# Altium PCB DEV BOARD PCB.PcbDoc (part 2 of 2)
Units mil, origin at the board's own origin, x right, y up, seen from the top; angles counter-clockwise.
Board outline 4844 x 4603 mil, 2 copper layers (Top Layer, Bottom Layer); 78 components, 97 nets, 348 pads, 240 vias.
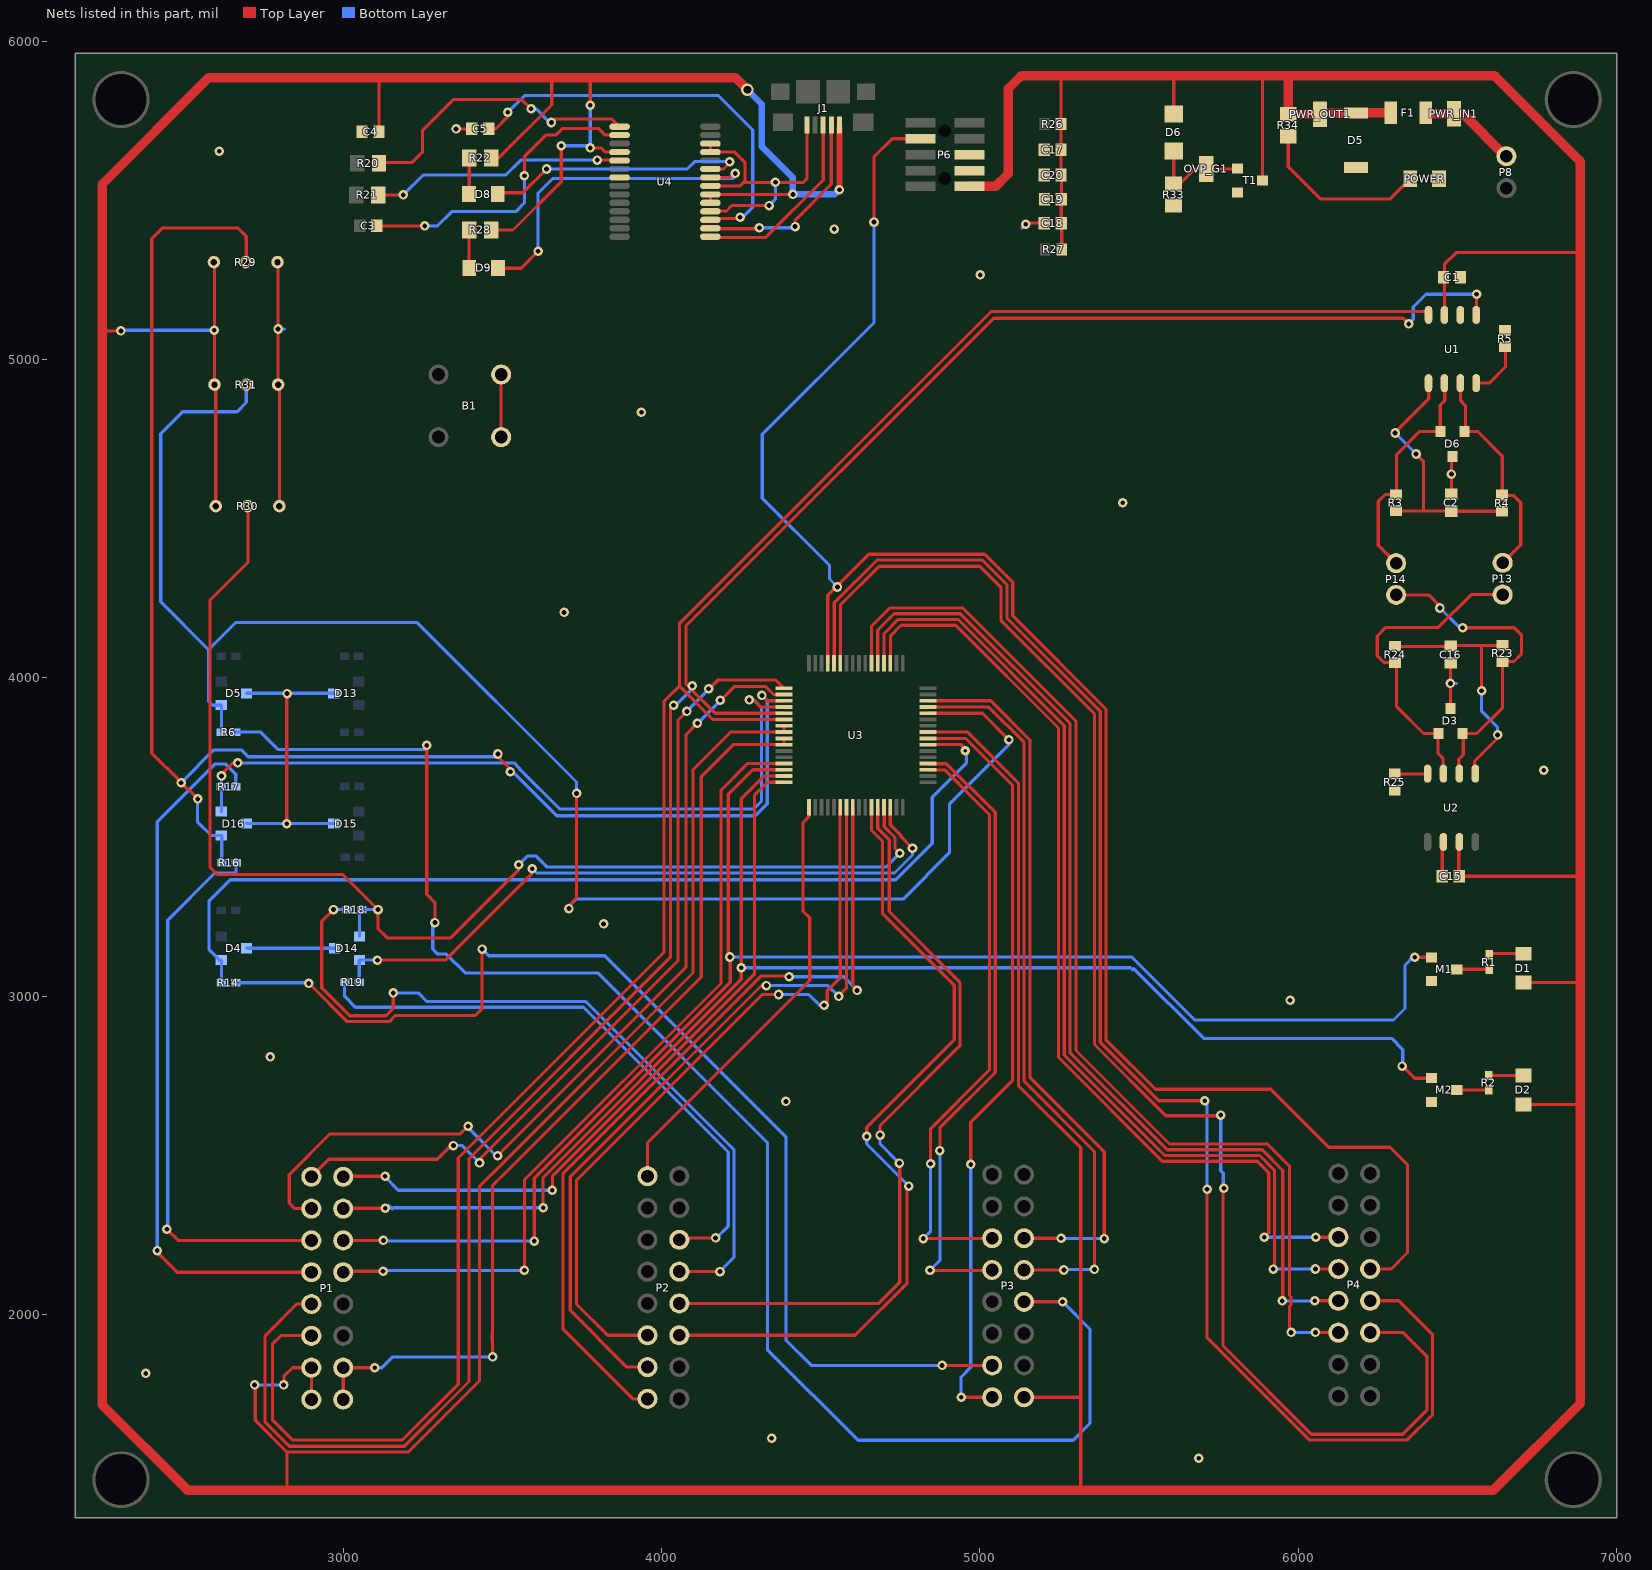
[diagram p2: the nets of this part, all layers, seen from the top]

## Via types
v1: diameter 30, hole 15, Top Layer to Bottom Layer, 236 vias
v2: diameter 30, hole 10, Top Layer to Bottom Layer, 3 vias
v3: diameter 40, hole 25, Top Layer to Bottom Layer, 1 vias

## Nets (pads, with @x,y where several pads share a name; then routed paths per layer and width w, separated by ;. In a path a pad name is that pad's centre, name@x,y a point inside that pad or via, vN(x,y) a via of type N, cw(c..) or ccw(c..) an arc to the next point about the centre after c; other vN are vias at no path point) (continued)
C5: P4.13 P6.8 U3.61 | length 5734.8
  Top Layer w10: 4521.36,4213.64 4521.42,4213.7 ; U3.61@4521.42,4046.38 4521.42,4213.7 ; v1(4667,5433) 4667,5638 4724,5695 P6.8@4813.23,5695 ; P4.13@6226.66,2142.29 6292.29,2142.29 6344,2194 6344,2470 6289,2525 6096,2525 5914,2707 5551.91,2707 5396,2862.91 5396,3902.54 5103,4195.54 5103,4301 5015,4389 4651,4389 4521.42,4259.42 4521.42,4213.7
  Bottom Layer w10: v1(4552,4286) 4527,4311 4527,4354 4316,4565 4316,4766 4667,5117 v1(4667,5433)
C6_UART1_RX: P4.4 U3.52 | length 3178.7
  Top Layer w10: U3.52@4698.58,4046.38 4698.58,4139.58 4743,4184 4931.09,4184 5265,3850.09 5265,2814.96 5580.96,2499 5879,2499 5925.71,2452.29 ; v1(5922,2142) 5926.29,2146.29 5926.29,2451.71 ; v1(6054.71,2142.29) P4.4@6126.66,2142.29
  Bottom Layer w10: v1(5922,2142) 6054.43,2142 v1(6054.71,2142.29)
C7_UART1_TX: P4.3 U3.51 | length 3043.5
  Top Layer w10: U3.51@4717.49,4054 4719.05,4054 4719.05,4133.05 4752,4166 4923.63,4166 5247,3842.63 5247,2807.51 5573.51,2481 5871.54,2481 5907.71,2444.83 5907.71,2255.71 v1(5894,2242) ; v1(6055.29,2242.29) P4.3@6126.66,2242.29
  Bottom Layer w10: v1(5894,2242) 6055,2242 v1(6055.29,2242.29)
C8_UART1_RX: P3.4 U3.36 | length 1996.5
  Top Layer w10: U3.36@4836.38,3731.42 4836.38,3730.64 4894.73,3730.64 5048,3577.37 5048,2760 4875.5,2587.5 4874.96,2587.5 4874,2586.54 v1(4874,2514.54) ; v1(4843,2138) 5037.48,2138 P3.4@5038.54,2139.06
  Bottom Layer w10: v1(4843,2138) 4874,2169 v1(4874,2514.54)
C9_UART1_TX: P3.3 U3.35 | length 1887.9
  Top Layer w10: v1(4822,2238) 5037.48,2238 P3.3@5038.54,2239.06 ; U3.35@4836.38,3711.73 4836.38,3710.95 4888.96,3710.95 5030,3569.91 5030,2768 4845,2583 v1(4845,2473)
  Bottom Layer w10: v1(4822,2238) 4845,2261 v1(4845,2473)
C14_ADC0_12_H: P2.14 R19.2 | length 1856.3
  Top Layer w10: P2.14@4055.06,2233.96 4061.1,2240 v1(4169,2240)
  Bottom Layer w10: R19.2@3003,3042 3003,2999 3037,2965 3249,2965 3754,2965 4209,2510 4209,2277.07 4171.93,2240 v1(4169,2240)
C14_ADC0_12_M: D14.2 R19.1 U3.30 | length 2141.9
  Top Layer w10: v1(3105.98,3113.02) 3319.02,3113.02 3421,3215 3590.89,3384.89 3590.89,3397.89 v1(3593,3400) ; U3.30@4718.27,3593.62 4718,3593.35 4718,3538.91 4751,3505.91 4751,3502 v1(4788,3465)
  Bottom Layer w10: R19.1@3048.93,3043.05 3048.93,3110.93 D14.2@3050,3112 ; D14.2@3050.06,3113.02 v1(3105.98,3113.02) ; v1(3593,3400) 3606,3387 3618,3387 4721,3387 4731.54,3387 4788,3443.46 v1(4788,3465)
C15_ADC0_13_H: P2.13 R18.2 | length 2429
  Top Layer w10: v1(2968,3272) 2931,3235 2931,3026 3019,2938 3133,2938 3156,2961 v1(3156,3010) ; P2.13@4055.06,2133.96 v1(4182.96,2133.96)
  Bottom Layer w10: v1(2968,3272) R18.2@3011,3272 ; v1(3156,3010) 3234.05,3010 3261.05,2983 3761.46,2983 4227,2517.46 4227,2179 4182.96,2134.96 v1(4182.96,2133.96)
C15_ADC0_13_M: D14.1 R18.1 R30.2 U3.29 | length 3923
  Top Layer w10: R30.2@2699,4540 2699,4363 2580,4244 2580,3405 2603,3382 2998,3382 v1(3107.98,3272.02) 3108,3212 3137,3183 3336,3183 3550,3397 v1(3550,3413) ; U3.29@4698,3588 4699.36,3586.64 4699.36,3532.09 4733,3498.46 4733,3464 v1(4748,3449)
  Bottom Layer w10: D14.1@3050.06,3187.82 3050.06,3264.06 R18.1@3056,3270 ; R18.1@3057.06,3272.02 v1(3107.98,3272.02) ; v1(3550,3413) 3577,3440 3605,3440 3637.92,3407.08 3637.92,3406 4705,3406 v1(4748,3449)
C16: P2.12 U3.28 | length 2449.1
  Top Layer w10: P2.12@4055.06,2033.96 4681.96,2033.96 4748,2100 v1@4748,2475 ; U3.28@4678.9,3593.62 4678.9,3527.1 4715,3491 4715,3266 4937,3044 4937,2843.6 4686,2592.6 v1(4686,2563)
  Bottom Layer w10: v1@4686,2562 4686,2536 v1(4747,2475)
C17: P2.11 U3.27 | length 2558
  Top Layer w10: P2.11@4055.06,1933.96 4607.42,1933.96 4771,2097.54 4771,2398 v1(4776,2403) ; v1(4644,2559) 4644,2588 4919,2863 4919,3034 4694,3259 4694,3486 4659.21,3520.79 U3.27@4659.21,3593.62
  Bottom Layer w10: v1(4644,2559) 4644,2535 v1(4776,2403)
CAN0_N: D6.2@6448.2,4775 P14.1 R3.1 U1.6 | length 742.4
  Top Layer w10: R3.1@6307.7,4576.37 6273.37,4576.37 6252,4555 6252,4417 P14.1@6308,4361 ; R3.1@6309,4575 6309,4701 6383,4775 D6.2@6447,4775 ; D6.2@6447,4768 D6.2@6447,4775 ; D6.2@6448.2,4775 D6.2@6447,4775 ; U1.6@6461,4927 6461,4872 6447,4858 D6.2@6447,4775
CAN0_P: D6.1@6523,4775 P13.1 R4.2 U1.7 | length 712
  Top Layer w10: U1.7@6511,4927 6511,4871 6526,4856 D6.1@6526,4775 ; D6.1@6523,4775 D6.1@6526,4775 ; R4.2@6641.07,4574.96 6642.03,4574 6677,4574 6700,4551 6700,4419 P13.1@6643,4362 P13.1@6643,4359 ; R4.2@6642,4579 6642,4697 6564,4775 D6.1@6526,4775
CAN1_N: D3.2 P14.2 R23.1 U2.6 | length 1013.3
  Top Layer w10: P14.2@6308,4261 6411,4261 6446,4226 v1(6446,4220) ; U2.6@6505.07,3698.06 6505.07,3745.07 6519,3759 D3.2@6519,3825.63 ; D3.2@6516.4,3825.63 D3.2@6519,3825.63 ; v1(6517,4158) 6680,4158 6702,4136 6702,4075 6678.82,4051.82 R23.1@6643,4051.82 ; D3.2@6519,3828 D3.2@6519,3825.63 ; R23.1@6644,4045 6643,4044 6643,3907 6561.63,3825.63 D3.2@6519,3825.63
  Bottom Layer w10: v1(6446,4220) 6508,4158 v1(6517,4158)
CAN1_P: D3.1 P13.2 R24.2 U2.7 | length 1013.6
  Top Layer w10: R24.2@6305.07,4048.19 6271,4048.19 6271,4047.81 6249,4069.81 6249,4132 6276,4159 6441,4159 6544,4262 P13.2@6643,4262 ; R24.2@6307,4046 6309,4044 6309,3911 6394.37,3825.63 D3.1@6440,3825.63 ; D3.1@6440,3826 D3.1@6440,3825.63 ; D3.1@6441.6,3825.63 D3.1@6440,3825.63 ; U2.7@6455.07,3698.06 6455.07,3747.93 6440,3763 D3.1@6440,3825.63
D0_SPI1_SCK: P1.2 U3.2 | length 2882.4
  Top Layer w10: P1.2@2898.53,2332.09 2846.64,2332.09 2829,2349.73 2829,2438 2828.5,2438.5 2957,2567 3367,2567 v1(3391,2591) ; v1(3483.7,2498) 4076,3090.3 4076,3821.43 v1(4112,3857.43) ; v1(4184,3930) 4185,3930 4228,3973 4326.13,3973 4351.18,3947.95 U3.2@4383.62,3947.95
  Bottom Layer w10: v1(3391,2591) 3391,2586 3483.7,2493.3 v1(3483.7,2498) ; v1(4112,3857.43) 4112.43,3857.43 4184,3929 v1(4184,3930)
D1_SPI1_SIN: P1.1 U3.1 | length 2642.9
  Top Layer w10: P1.1@2898.53,2432.09 2953.44,2487 3294,2487 3341,2534 v1(3345,2530) ; v1(3427,2475.8) 3427,2487 4051,3111 4051,3868 4078,3895 v1(4079,3895) ; v1(4147,3966) 4149,3966 4177,3994 4357.26,3994 U3.1@4383.62,3967.64
  Bottom Layer w10: v1(3345,2530) 3372.8,2530 v1(3427,2475.8) ; v1(4079,3895) 4079,3896 4147,3964 v1(4147,3966)
D2_SPI1_SOUT: P3.14 U3.46 | length 2288.5
  Top Layer w10: U3.46@4836.38,3928.27 5033.79,3928.27 5157,3805.05 5157,2745 5391,2511 v1(5391,2238) ; P3.14@5138.54,2239.06 v1(5255.06,2239.06)
  Bottom Layer w10: v1(5255.06,2239.06) 5256.13,2238 v1(5391,2238)
D3_SPI1_PCS0: P3.13 U3.45 | length 2319
  Top Layer w10: U3.45@4836.38,3908.58 5028.02,3908.58 5139,3797.6 5139,2732 5360,2511 v1(5360,2141) ; P3.13@5138.54,2139.06 v1(5263.94,2139.06)
  Bottom Layer w10: v1(5263.94,2139.06) 5265.87,2141 v1(5360,2141)
D4_ADC1_6_H: P3.12 R6.2 | length 4936.8
  Top Layer w10: v1(3261.05,3788) 3261.05,3319.95 3287,3294 v1(3287,3231) ; P3.12@5138.54,2039.06 v1(5259.94,2039.06)
  Bottom Layer w10: R6.2@2660.95,3829.86 2739.14,3829.86 2794,3775 3257,3775 3258,3774 3261.05,3777.05 v1(3261.05,3788) ; v1(3287,3231) 3280,3224 3280,3148 3296,3132 3322.82,3132 3381.82,3073 3798.73,3073 4332,2539.73 4332,1889 4617,1604 5292.91,1604 5346,1657.09 5346,1953 v1(5259.94,2039.06)
D4_ADC1_6_M: D5.1@2615.57,3914.45 R6.1 R31.2 U3.44 | length 5211.6
  Top Layer w10: R31.2@2690,4914 2688,4916 R31.2@2691,4919 ; v1(3708,3275) 3703,3280 3732,3309 v1(3732,3637) ; U3.44@4836.38,3888.9 5008.1,3888.9 v1(5091,3806)
  Bottom Layer w10: D5.1@2613,3913 2615.67,3910.33 R6.1@2615.67,3829.86 ; D5.1@2615.57,3914.45 2587.55,3914.45 2575,3927 2575,4089 ; R31.2@2694,4922 2694,4866 2665,4837 2494,4837 2425,4768 2425,4239 2575,4089 ; v1(3708,3275) 3708,3281.75 3730,3303.75 ; 3730,3305 4758.46,3305 4904,3450.54 4904,3602.63 5091,3789.63 v1(5091,3806) ; v1(3732,3637) 3732,3673 3231,4174 2660,4174 2575,4089
D5: P2.8 U3.24 | length 2640.3
  Top Layer w10: P2.8@3955.06,1733.96 3909.04,1733.96 3689,1954 3689,2441 4311,3063 4389,3063 4400,3052 v1(4400,3061) ; U3.24@4600.16,3593.62 4600,3593.46 4600,3036 4614,3022 v1(4614,3018)
  Bottom Layer w10: v1(4400,3061) 4572,3061 4614,3019 v1(4614,3018)
D6_UART2_RX: P2.7 U3.23 | length 2451.2
  Top Layer w10: P2.7@3955.06,1833.96 3890.04,1833.96 3712,2012 3712,2432 4315,3035 4317,3033 v1(4329,3033) ; v1(4556,2999) 4556,3000.99 4581,3025.99 4581,3130 4580.47,3130.53 ; 4580.47,3130 4580.47,3130.53 ; U3.23@4580.47,3593.62 4580.47,3130.53
  Bottom Layer w10: v1(4329,3033) 4522,3033 v1(4556,2999)
D7_UART2_TX: P2.6 U3.22 | length 2331.7
  Top Layer w10: P2.6@3955.06,1933.96 3829.96,1933.96 3732,2031.93 3732,2421.05 4315.95,3005 v1(4367,3005) ; v1(4510,2971) 4520,2981 4520,3017 4561,3058 4561,3128 ; 4560.79,3127 4560.5,3127.29 4560.5,3593.33 U3.22@4560.79,3593.62
  Bottom Layer w10: v1(4367,3005) 4462,3005 4496,2971 v1(4510,2971)
D15_LED_R2: M2.1 P1.15 U3.15 | length 4689.8
  Top Layer w10: P1.15@3005,2328 3010,2333 v1(3131,2333) ; v1(3627,2335) 3627,2429.91 4250,3052.91 v1(4250,3089) 4250,3620 4322.05,3692.05 U3.15@4383.62,3692.05 ; v1(6327,2780) 6329,2780 6367,2742 M2.1@6420,2742
  Bottom Layer w10: v1(3131,2333) 3140.96,2342.96 3152.91,2331 3156.91,2335 v1(3627,2335) ; v1(4250,3089) 5473,3089 5480,3082 5484,3086 5703,2867 6294,2867 6329,2832 v1@6329,2781
D16_LED_R1: M1.1 P1.14 U3.14 | length 4926.9
  Top Layer w10: P1.14@3000,2230 3002,2232 v1(3125,2232) ; v1(3599,2230) 3599,2427.37 4215,3043.37 4215,3122 v1(4214,3123) 4220,3123 4209,3134 4209,3634.54 4286.19,3711.73 U3.14@4383.62,3711.73 ; v1(6367,3122) M1.1@6418,3122
  Bottom Layer w10: v1(3125,2232) 3129,2228 3131,2230 v1(3599,2230) ; v1(4214,3123) 5477,3123 5675,2925 6300,2925 6336,2961 6336,3097 6361,3122 v1(6367,3122)
D_N: J1.2 U4.16 | length 614.7
  Top Layer w10: U4.16@4161,5416 4165,5412 4304,5412 v1(4307,5415) ; v1(4419,5419) 4419,5439 4532.83,5552.83 J1.2@4532.83,5724
  Bottom Layer w10: v1(4307,5415) 4415,5415 v1(4419,5419)
D_P: J1.3 U4.15 | length 599.7
  Top Layer w10: U4.15@4145,5385 4327,5385 4507.24,5565.24 J1.3@4507.24,5728
E0_I2C1_SDA: P4.12 U3.60 | length 4895.2
  Top Layer w10: U3.60@4540.32,4052 4541.88,4053.56 4541.88,4235.88 4677,4371 5007.54,4371 5085,4293.54 5085,4188.09 5378,3895.09 5378,2855.46 5562.46,2671 v1(5707,2671) ; v1(5714,2393) 5714,1925.54 6034.54,1605 6343,1605 6423,1685 6423,1936 6316.71,2042.29 P4.12@6226.66,2042.29
  Bottom Layer w10: v1(5707,2671) 5714,2664 v1(5714,2393)
E1_I2C1_SCL: P4.11 U3.59 | length 4689.1
  Top Layer w10: U3.59@4560.01,4071 4561.57,4072.56 4561.57,4229.57 4683,4351 5000,4351 5066,4285 5066,4181 5360,3887 5360,2848 5584,2624 5755,2624 v1(5757,2626) ; v1(5767,2396) 5769,2396 5764,2391 5764,1901 6042,1623 6329.46,1623 6405,1698.54 6405,1868 6330.71,1942.29 P4.11@6226.66,1942.29
  Bottom Layer w10: v1(5757,2626) 5757,2451 5765,2443 v1@5765,2396
E2_SPI0_SOUT: P4.6 U3.54 | length 3464.4
  Top Layer w10: U3.54@4659.21,4046.38 4659.21,4162.21 4717,4220 4946,4220 5302,3864 5302,2828.87 5595.87,2535 5903.42,2535 5973.14,2465.28 5973.18,2456.82 5973.18,2058.42 5978,2053.6 5978,2030.4 5973.18,2025.58 5973.18,1947.82 v1(5978,1943) ; v1(6054.71,1942.71) 6054.71,1942.29 P4.6@6126.66,1942.29
  Bottom Layer w10: v1(5978,1943) 6054.43,1943 v1(6054.71,1942.71)
E3_UART2_RTS: P1.13 U3.13 | length 2575.8
  Top Layer w10: P1.13@3005,2137 3007,2135 v1(3124,2135) ; v1@3557,2134 3561,2138 v1(3568,2138) 3568,2422 3568.09,2421.91 4185.96,3039.79 4185.96,3647.51 4269.87,3731.42 U3.13@4383.62,3731.42
  Bottom Layer w10: v1(3124,2135) 3127,2138 v1(3568,2138)
E4_CAN0_RX: P1.6 U1.4 U3.6 | length 6879.5
  Top Layer w10: P1.6@2898.53,1932.09 2897.63,1933 2803,1933 2776,1906 2776,1668 2839,1605 3185,1605 3360,1780 3360,2491 4007,3138 4007,3926.6 4056,3975.6 4056,4172.28 5035.72,5152 5081,5152 ; 4056,3974 4160.79,3869.21 U3.6@4383.62,3869.21 ; 5072,5152 6334,5152 6399.28,5152 U1.4@6410,5141.28
E5_CAN0_TX: P1.5 U1.1 U3.5 | length 7288
  Top Layer w10: P1.5@2898.53,2032.09 2853.09,2032.09 2753,1932 2753,1661 2829,1585 3190.46,1585 3394,1788.54 3394,2489 4027,3122 4027,3903 v1@4038,3914 ; v1(4037,3914) v1@4038,3914 ; v1@4039,3915 v1@4038,3914 ; v1@4093,3964 4076,3981 4076,4164 5043,5131 5115,5131 ; v1@4093.5,3963.5 4168.1,3888.9 U3.5@4383.62,3888.9 ; v1@4095,3966 4101,3972 4098,3975 v1(4096,3975) ; 5093,5131 6330,5131 v1(6348,5113) ; U1.1@6560,5141.28 6561,5142.28 v1(6561,5206)
  Bottom Layer w10: v1(4037,3914) 4044,3914 4101,3971 4097,3975 v1(4096,3975) ; v1(6348,5113) 6362,5127 6362,5166 6402,5206 v1(6561,5206)
E6_SPI0_PCS2: P4.5 U3.53 | length 3317.5
  Top Layer w10: U3.53@4678.9,4046.38 4678.9,4150.9 4730,4202 4938.54,4202 5283,3857.54 5283,2822.42 5588.42,2517 5886.91,2517 5951.91,2452 5952,2429 5952,2044 v1(5950,2042) ; v1(6052.29,2042.29) P4.5@6126.66,2042.29
  Bottom Layer w10: v1(5950,2042) 6052,2042 v1(6052.29,2042.29)
E7_ADC2_2_H: P3.7 R14.2 | length 3549.8
  Top Layer w10: v1(2890,3040) 2891,3040 3011,2920 3143,2920 3162,2939 3414,2939 3435.05,2960.05 v1(3435.05,3148) ; v1(4880.94,1839.06) P3.7@5038.54,1839.06
  Bottom Layer w10: R14.2@2660.31,3041.95 2888.05,3041.95 v1(2890,3040) ; v1(3435.05,3148) 3456.05,3127 3821.1,3127 4390,2558.1 4390,1919 4469.94,1839.06 v1(4880.94,1839.06)
E7_ADC2_2_M: D4.1 R14.1 U3.39 | length 3100.9
  Top Layer w10: U3.39@4836.38,3790.47 4941.53,3790.47 4954,3778 v2(4954,3771)
  Bottom Layer w10: D4.1@2614,3109 2577,3146 2577,3300 2643,3366 2694,3366 4736,3366 4850,3480 4850,3625 4957.5,3732.5 4957.5,3774.5 v2(4954,3771) ; D4.1@2615.57,3113.02 2615.57,3040.43 R14.1@2616,3040
E8: P2.1 U3.17 | length 1387.2
  Top Layer w10: P2.1@3955.06,2433.96 3955.06,2539.06 4465,3049 4465,3246 4444,3267 4444,3545.51 4462.36,3563.87 U3.17@4462.36,3593.62
E9_UART2_CTS: P1.16 U3.16 | length 2295.8
  Top Layer w10: P1.16@2995,2430 2999,2434 v1(3130,2434) ; v1(3656,2390) 3656,2433.46 4291,3068.46 4291,3631 4332.36,3672.36 U3.16@4383.62,3672.36
  Bottom Layer w10: v1(3130,2434) 3130,2432 3172,2390 v1(3656,2390)
E10_ADC2_12_H: P1.4 R17.2 | length 2237.7
  Top Layer w10: v1(2414,2200) 2414,2195.18 2477.09,2132.09 P1.4@2898.53,2132.09
  Bottom Layer w10: v1(2414,2200) 2414,3548 2596,3730 2628,3730 2660.84,3697.16 R17.2@2660.84,3658.82
E10_ADC2_12_M: D16.2 R17.1 U3.4 | length 2359.9
  Top Layer w10: v1(2616,3692) 2616,3697 2652,3733 v1@2666,3733 ; v1(4275,3931) 4288.17,3931 4310.58,3908.58 U3.4@4383.62,3908.58
  Bottom Layer w10: R17.1@2615,3658 2615.57,3657.43 D16.2@2615.57,3579.62 ; R17.1@2615.57,3658.82 2616,3659.25 v1(2616,3692) ; v1(2667,3733) 3535.6,3733 3552,3716.6 3552,3715 3679,3588 4289,3588 4313.27,3612.27 4313.27,3906.67 4288.94,3931 v1(4275,3931)
E11_ADC2_13_H: P1.3 R16.2 | length 1757.5
  Top Layer w10: v1(2444.5,2267.5) 2479.91,2232.09 P1.3@2898.53,2232.09 P1.3@2892.63,2238
  Bottom Layer w10: v1(2444.5,2267.5) 2447,2270 2447,3239 2594,3386 2662,3386 R16.2@2662,3418
E11_ADC2_13_M: D16.1 R16.1 R29.2 U3.3 | length 4893.5
  Top Layer w10: v1(2541,3620) 2490,3671 v1(2489,3671) 2489,3672 2397,3764 2397,5381 2430,5414 2668,5414 2694,5388 R29.2@2694,5312 ; v1@3485,3753 3524,3714 v1(3524,3705) ; v1(4314.54,3945) 4331.27,3928.27 U3.3@4383.62,3928.27
  Bottom Layer w10: v1(2489,3671) 2592,3774 2678.6,3774 2700.1,3752.5 2722,3752.5 3476.5,3752.5 v1(3485,3761) ; v1(2541,3620) 2541,3547 2583.19,3504.81 D16.1@2615.57,3504.81 ; R16.1@2617,3419.82 D16.1@2617,3505 ; v1@3522,3715 3670,3567 4293.46,3567 4331.27,3604.81 4331.27,3928.27 v1(4314.54,3945)
FTDI_GREEN: D8.2 U4.23 | length 839.8
  Top Layer w10: D8.2@3486,5525 3563,5525 v1(3637.92,5599.92) ; U4.23@4152.72,5599.92 4193.92,5599.92 4213,5619 v1(4213,5623)
  Bottom Layer w10: v1(3637.92,5599.92) 4080,5599.92 4080,5600 4103,5623 v1(4213,5623)
FTDI_RED: D9.2 U4.22 | length 1061.3
  Top Layer w10: D9.2@3490,5288 3558,5288 v1(3611,5341) ; U4.22@4152.72,5573.31 4212.31,5573.31 4226,5587 4227,5586 v1(4231,5586)
  Bottom Layer w10: v1(3611,5341) 3611,5524 3657,5570 4224,5570 4231,5577 v1(4231,5586)
GND: B1.2 B1.4 C1.1 C2.1 C4.1 C5.1 C15.1 C16.1 C17.1 C18.1 C19.1 C20.1 D3.3 D4.3 D5.1@6182,5604.37 D5.3 D6.3 D13.3 D14.3 D15.3 D16.3 J1.5 M1.2 M2.2 P1.9 P1.10 P3.8 P6.3 P6.5 POWER.2 R5.1 R25.1 R29.3 R30.3 R31.3 R33.1 T1.2 U1.2 U2.2 U3.9 U3.10 U3.40 U4.7 U4.18 U4.21 U4.25 U4.26 | length 9130.7
  Top Layer w10: R29.3@2793,5307 2794,5306 v1(2794,5097) R31.3@2794,4922 ; R31.3@2795,4921 2798,4918 R30.3@2798,4540 ; v1(2821.21,3542) 2821.21,3950.21 v1(2822,3951) ; P1.9@2998.53,1732.09 P1.10@2998.53,1832.09 v1(3097.91,1832.09) ; v1(3353.3,5725.7) C5.1@3402.57,5725.7 ; v1(3468,1866) 3468,1915.4 3467,1916.4 3467,1939.6 3468,1940.6 3468,2404.91 3496.06,2432.97 3497.03,2432.97 3505.53,2441.47 4124,3059.95 4124,3690 4224.47,3790.47 U3.10@4383.62,3790.47 U3.9@4383.62,3810.16 ; B1.4@3494,4954 3495,4953 B1.2@3495,4757.15 ; U4.18@4152.72,5466.85 4153.87,5468 4203.46,5468 4220.46,5485 v1(4337.3,5485) ; U4.21@4152.72,5546.69 4245.69,5546.69 4256,5557 ; U4.26@4152.72,5679.76 U4.25@4152.72,5653.15 4228.97,5653.15 4262,5620.12 4262,5563 4256,5557 ; v1(4357,5558) v1@4358,5557 ; J1.5@4456.06,5722 4456.06,5569.06 4444,5557 v1@4358,5557 ; U3.40@4836.38,3810.16 4837.16,3809.38 4956.17,3809.38 5102,3663.54 5102,2734 4971,2603 v1(4971,2471) ; v1(4940.94,1739.06) P3.8@5038.54,1739.06 ; v1(5144,5426) 5148.08,5430.08 C18.1@5202.39,5430.08 ; C17.1@5201.85,5658.85 C17.1@5202,5659 ; C20.1@5202,5581 C20.1@5202.86,5580.14 ; C19.1@5202.39,5504.39 C19.1@5203,5505 ; C15.1@6453,3376 6453,3481.43 U2.2@6455.07,3483.5 ; C16.1@6477,4048 6479,4046 v1(6479,3983) D3.3@6479,3904.37 ; D6.3@6481,4696 6482.07,4694.93 v1(6482.07,4641) C2.1@6482.07,4577.35 ; 4256,5557 v1@4358,5557
  Bottom Layer w10: D5.3@2694.31,3951.86 D13.3@2968.79,3951.86 2969.14,3951.86 D13.3@2971,3950 ; D16.3@2695,3544 2696.79,3542.21 v1@2821,3542.21 ; D4.3@2696,3152 2697.58,3150.42 D14.3@2971.32,3150.42 ; v1(2794,5097) 2813,5097 ; v1(2821.21,3542) v1@2821,3542.21 ; D15.3@2968.79,3542.21 v1@2821,3542.21 ; v1(3097.91,1832.09) 3120.09,1832.09 3154,1866 v1(3468,1866) ; v1@3342.7,5725.7 v1(3353.3,5725.7) ; v1(4337.3,5485) 4357,5504.7 v1(4357,5558) ; v1(4940.94,1739.06) 4940.94,1802.06 4940.5,1802.5 4971,1833 v1(4971,2471) ; 5133,5415 v1(5144,5426) ; v1(5449,4551) v1@5458,4551 ; v1(6479,3983) 6497,3983
  other v1: 5688,1547 4345,1610 2378,1814 4390,2669 2769,2809 5975,2987 3817,3227 6772,3710 3693,4206 3936,4835 5001,5267 4542,5411 2609,5656
NetC2_2: C2.2 R3.2 R4.1 U1.5 | length 819.7
  Top Layer w10: v1(6305,4770) 6304,4771 6411,4878 U1.5@6411,4927 ; R3.2@6307.7,4525.19 6480.81,4525.19 C2.2@6482,4524 ; v1(6371,4704) 6394,4681 6394,4526 ; C2.2@6482.07,4524.2 6639.8,4524.2 R4.1@6643,4521
  Bottom Layer w10: v1(6305,4770) v1(6371,4704)
NetC3_1: C3.1 U4.2 | length 985.3
  Top Layer w10: C3.1@3103.61,5421.02 v1@3255.98,5421.02 ; v1(3568,5579) 3568,5638.69 3635.68,5706.38 3666.38,5706.38 3687,5727 3802,5727 3822.62,5706.38 U4.2@3867.28,5706.38
  Bottom Layer w10: v1(3255,5421) 3295,5421 3340,5466 3541,5466 3568,5493 v1(3568,5579)
NetC16_2: C16.2 R23.2 R24.1 U2.5 | length 798.1
  Top Layer w10: R24.1@6305.07,4099.37 6479.37,4099.37 C16.2@6480,4100 ; C16.2@6480,4102 6577,4102 ; C16.2@6480.37,4099.37 C16.2@6481,4100 ; U2.5@6555.07,3698.06 6555.07,3739.07 6632,3816 v1(6627,3821) ; v1(6577,3960) 6577,4102 ; R23.2@6643,4103 6642,4102 6577,4102
  Bottom Layer w10: v1(6577,3960) 6577,3895 6627,3845 v1(6627,3821)
NetD1_2: D1.2 R1.2 | length 106.7
  Top Layer w10: R1.2@6602,3133 6602.46,3133.46 D1.2@6708.47,3133.46
NetD2_2: D2.2 R2.2 | length 109.8
  Top Layer w10: R2.2@6599,2751 6599.77,2750.23 D2.2@6708.47,2750.23
NetD6_1: D6.1@5609,5656.86 OVP_G1.1 R33.2 T1.1 | length 320.9
  Top Layer w10: R33.2@5609,5554 5629,5554 5675,5600 T1.1@5810,5600 ; R33.2@5609,5556 D6.1@5609,5656.86
NetD8_1: D8.1 R22.1 | length 108.7
  Top Layer w10: R22.1@3394.7,5634.71 3394.7,5529.3 D8.1@3397,5527
NetD9_1: D9.1 R28.1 | length 117.6
  Top Layer w10: D9.1@3394.45,5289 3394.45,5404.45 R28.1@3396,5406
NetM1_3: M1.3 R1.1 | length 103.6
  Top Layer w10: M1.3@6498.37,3084.24 6598.76,3084.24 R1.1@6601,3082
NetM2_3: M2.3 R2.1 | length 99.9
  Top Layer w10: M2.3@6500,2706 6501.05,2704.95 R2.1@6599.44,2704.95
NetPOWER_1: POWER.1 R34.1 | length 547.8
  Top Layer w10: R34.1@5969,5703.1 5969,5607 6070,5506 6289.72,5506 POWER.1@6352.72,5569
NetR5_2: R5.2 U1.8 | length 175.1
  Top Layer w10: U1.8@6561,4927 6601,4927 6652,4978 R5.2@6652,5041
NetR20_1: R20.1 U4.1 | length 928.5
  Top Layer w10: R20.1@3112,5620 3214,5620 3248,5654 3248,5722 3344,5818 3560,5818 v1(3589,5789) ; v1(3653,5746) 3664,5757 3843.28,5757 U4.1@3867.28,5732.99
  Bottom Layer w10: v1(3589,5789) 3605,5789 3653,5741 v1(3653,5746)
NetR21_1: R21.1 U4.5 | length 790.3
  Top Layer w10: R21.1@3109.04,5518.49 v1(3187.49,5518.49) ; v1(3797,5628) U4.5@3854,5628
  Bottom Layer w10: v1(3187.49,5518.49) 3250,5581 3510,5581 3557,5628 v1(3797,5628)
NetR25_2: R25.2 U2.8 | length 101.6
  Top Layer w10: R25.2@6304,3698.59 6403.59,3698.59 U2.8@6405,3700
PWR_IN: F1.1 P8.1 PWR_IN1.1 | length 299.3
  Top Layer w30: F1.1@6411,5774 6518,5774 P8.1@6654,5638
VCC: C1.2 C4.2 C15.2 C17.2 C18.2 C19.2 C20.2 D1.1 D2.1 D5.2@6182,5775.63 D6.2@5609,5773 F1.2 J1.1 P1.7 P1.8 P3.9 P6.1 PWR_OUT1.1 R22.2 R26.2 R27.2 R28.2 R29.1 R30.1 R31.1 R34.2 T1.3 U1.3 U2.3 U3.7 U3.8 U3.41 U4.4 U4.19 U4.20 | length 30219.7
  Top Layer w10: 2243,5090 2244,5091 v1(2300,5091) ; R29.1@2591,5306 2594,5303 v1@2594,5093 ; v1(2593,5093) v1@2594,5093 ; R31.1@2594,4922 v1@2594,5093 ; R31.1@2595,4917 2598,4914 R30.1@2598,4540 ; v1@2722,1770 2722,1666.54 2821.54,1567 ; v1(2811,1778) 2812,1779 2812,1805 2839.09,1832.09 P1.7@2898.53,1832.09 P1.8@2898.53,1732.09 ; 2822,1447 2821.54,1447.46 2821.54,1567 ; C4.2@3111.13,5717.24 3111.13,5887 ; R28.2@3463.6,5408.16 3532.16,5408.16 3684,5560 v1(3684,5673) ; R22.2@3463.6,5634.71 3487.71,5634.71 3654,5801 3654,5887 ; v1(3775,5666) 3810,5666 3822.85,5653.15 U4.4@3867.28,5653.15 ; v1(3775,5800) 3775,5876.85 3784,5885.85 3782.85,5887 ; U4.19@4152.72,5493.46 U4.20@4152.72,5520 ; U4.20@4152.72,5520.08 U4.20@4152.72,5520 ; U3.7@4383.62,3849.53 U3.8@4383.62,3829.84 4215.84,3829.84 4098,3712 4098,3072.7 3495.3,2470 3495,2470 3427,2402 3427,1791 3203,1567 2821.54,1567 ; v1(4412,5520) U4.20@4152.72,5520 ; U3.41@4836.38,3829.84 4961.16,3829.84 5121,3670 5121,2719 5317,2523 5317,1739.06 ; P3.9@5138.54,1739.06 5317,1739.06 ; C20.2@5253,5577 5256.01,5573.99 C19.2@5256.01,5504.46 ; R26.2@5253,5733 5255,5731 C17.2@5255,5661 C20.2@5255,5581 ; C18.2@5255,5429 5256.99,5427.01 R27.2@5256.99,5346.98 ; C19.2@5255,5502 5255.54,5501.46 C18.2@5255.54,5430.08 ; R26.2@5255,5741 5255,5892 ; 5317,1447 5317,1739.06 ; D6.2@5609,5773 5609,5891 5611,5893 ; 5887,5893 5888.37,5891.63 T1.3@5888.37,5564 ; 5968,5893 5969,5892 ; D5.2@6182,5775.63 D5.2@6182.37,5776 ; U1.3@6460,5141.28 6460,5300.4 6496.6,5337 6887,5337 ; C15.2@6505.07,3380.93 U2.3@6505.07,3483.5 ; C15.2@6506.64,3376.78 6886.78,3376.78 6887,3377 ; D2.1@6708.47,2659.68 6884.32,2659.68 6887,2657 ; D1.1@6708.47,3042.9 6884.9,3042.9 6887,3045
  Top Layer w20: v1(4558.43,5534.43) J1.1@4558.43,5730
  Top Layer w30: v3(4269,5849) 4231,5887 3782.85,5887 3654,5887 3111.13,5887 2576,5887 2241,5552 2241,1715 2509,1447 2822,1447 5317,1447 6614,1447 6887,1720 6887,2657 6887,3045 6887,3377 6887,5337 6887,5624 6618,5893 5968,5893 5887,5893 5611,5893 5130,5893 5089,5852 5089,5585 5049,5545 P6.1@4966.77,5545 ; 5969,5892 R34.2@5969,5772 PWR_OUT1.1@6069,5772 ; PWR_OUT1.1@6067.37,5775.63 D5.2@6182,5775.63 ; D5.2@6182.37,5776 F1.2@6291,5776
  Bottom Layer w10: v1(2300,5091) 2302,5093 v1(2593,5093) ; v1@2729,1778 v1(2811,1778) ; v1(3684,5673) 3768,5673 v1(3775,5666) v1(3775,5800)
  Bottom Layer w20: v3(4269,5849) 4314.54,5803.46 4314.54,5670.46 4412,5573 v1(4412,5520) 4544,5520 v1(4558.43,5534.43)
  other v1: 2720,1778
VCC_3V3: C5.2 U4.17 | length 1324.4
  Top Layer w10: C5.2@3455.72,5725.7 3477.7,5725.7 3516,5764 v1(3516,5778) ; U4.17@4159,5440 4163.01,5444.01 4242.01,5444.01 v1(4246,5448)
  Bottom Layer w10: v1(3516,5778) 3569,5831 4177.4,5831 4286,5722.4 4286,5480 4246,5440 v1(4246,5448)
pads on no net: J1.4 J1.6 J1.7 J1.8 J1.9 J1.10 J1.11 P6.7 P6.9 P6.MH1 P6.MH2 P8.2 U4.6 U4.8 U4.9 U4.10 U4.12 U4.13 U4.14 U4.24 U4.27 U4.28

## Polygon pours and split planes (outlines as drawn)
GND on Top Layer "Top Layer-GND" (solid, remove dead copper, pour order 4): 2562,5869 2305,5612 2253.37,5560.37 2242.72,1720.29 2506,1457 6624,1457 6844,1677 6892.64,1725.64 6892.64,5616.36 6640,5869
no net on Top Layer "Top Layer-No Net" (solid, pour order 0): 2371,5756
GND on Bottom Layer "GND_L02_P012" (solid, remove dead copper, pour order 12): 2583.11,5863 2265,5539.11 2265,1724 2519,1470 6604,1470 6863,1729 6863,5615 6608.58,5869.42

## Silkscreen, mask and mechanical layers (free items; w line width, h text height)
Top Overlay:
  text "PWR" at 6765,5620 h60
  text "GND" at 6765,5520 h60
  text "E11_ADC2" at 2440,5405 h60
  text "D4_ADC1" at 2456,5019 h60
  text "C15_ADC0" at 2444,4638 h60
  text "RESET" at 3312,4532 h60
  text "DESIGN & LAYOUT BY: AUSTIN CONRAD" at 3377,2718 h80
  text "A1_UART0_RTS" at 5626.13,2424.56 h60
  text "A2_UART0_RX" at 5233.44,2422.27 h60
  text "A4_JTAG_TMS" at 6327.79,2421.99 h60
  text "B1_SPI0_SOUT" at 4558.03,2418.26 h60
  text "E8" at 3800.87,2416.67 h60
  text "B2_SPI0_SCK" at 4159.88,2416.34 h60
  text "D1_SPI1_SIN" at 2472.34,2414.6 h60
  text "E9_UART2_CTS" at 3097.4,2413.35 h60
  text "A0_UART0_CTS" at 5627.31,2328.6 h60
  text "A3_UART0_TX" at 5234.05,2327.8 h60
  text "A5_JTAG_RST/RST" at 6329.54,2324.83 h60
  text "B0_SPI0_PCS0" at 4570,2320 h60
  text "D0_SPI1_SCK" at 2456.15,2317.49 h60
  text "B5_SPI0_PCS1" at 3485.56,2317.48 h60
  text "D15_LED_R2" at 3095.55,2314.4 h60
  text "B3_SPI0_SIN" at 4154.46,2313.73 h60
  text "C4_JTAG_TCLK" at 6329.57,2224.67 h60
  text "C9_UART1_TX" at 4573.13,2223.73 h60
  text "D2_SPI1_SOUT" at 5234.66,2223.57 h60
  text "C7_UART1_TX" at 5660.19,2223.38 h60
  text "D16_LED_R1" at 3098.63,2218.53 h60
  text "C14_ADC0_12" at 4154.23,2218.18 h60
  text "E11_ADC2_13" at 2452.69,2215.75 h60
  text "B4_SPI0_SOUT" at 3471.51,2212.22 h60
  text "C6_UART1_RX" at 5657.3,2127.89 h60
  text "C5_JTAG_TDI" at 6331.03,2125.1 h60
  text "C8_UART1_RX" at 4566.32,2123.06 h60
  text "D3_SPI1_PCS0" at 5234.66,2122.4 h60
  text "C15_ADC0_13" at 4150,2120 h60
  text "E3_UART2_RTS" at 3098.63,2116.5 h60
  text "C3_ADC0_11" at 3535.94,2117.11 h60
  text "E10_ADC2_12" at 2450.37,2112.28 h60
  text "E6_SPI0_PCS2" at 5655.54,2028.1 h60
  text "E0_I2C1_SDA" at 6333.96,2026.26 h60
  text "D4_ADC1_6" at 5236.96,2024.66 h60
  text "A7_UART1_RTS" at 4538.32,2018.6 h60
  text "E5_CAN0_TX" at 2470.61,2018.06 h60
  text "B6_I2C0_SDA" at 3101.09,2017.55 h60
  text "C2_ADC0_10" at 3532.51,2015.78 h60
  text "C16" at 4159.31,2014.95 h60
  text "E1_I2C1_SCL" at 6334.69,1929.62 h60
  text "E2_SPI0_SOUT" at 5646.79,1927.44 h60
  text "B12_ADC1_7" at 5237.1,1925.54 h60
  text "A6_UART1_CTS" at 4536.81,1920.96 h60
  text "B7_I2C0_SCL" at 3099.86,1914.92 h60
  text "E4_CAN0_RX" at 2465.33,1913.69 h60
  text "C17" at 4161.57,1914.46 h60
  text "D7_UART2_TX" at 3496.44,1913.3 h60
  text "A10_JTAG_TDO" at 6331.03,1828.59 h60
  text "A13_CAN1_TX" at 5663.07,1827.25 h60
  text "B13_ADC1_8" at 5239.54,1824.36 h60
  text "E7_ADC2_2" at 4651.1,1822.56 h60
  text "VDD" at 2693.73,1814.59 h60
  text "C0_ADC0_8" at 4162.7,1815.1 h60
  text "D6_UART2_RX" at 3489.69,1812.84 h60
  text "VREFL/VSS" at 3101.09,1810.43 h60
  text "A12_CAN1_RX" at 5657.3,1724.37 h60
  text "VDD" at 5242.26,1722.64 h60
  text "A11" at 6332.5,1722.43 h60
  text "VSS" at 4839.58,1718.1 h60
  text "D5" at 3798.14,1714.08 h60
  text "VDDA" at 2655.58,1712.86 h60
  text "C1_ADC0_9" at 4162.13,1711.79 h60
  text "VREFH" at 3102.93,1710.87 h60
  text "a" at 3420,1326 h2000 r0.25

## Text inside footprints (layer, text, board x,y; h text height)
D1: Top Overlay "*" at 6688.47,3148.18 h60 r90
D2: Top Overlay "*" at 6688.47,2764.95 h60 r90
D8: Top Overlay "*" at 3499.3,5541.24 h60
D9: Top Overlay "*" at 3499.72,5309 h60
POWER: Top Overlay "*" at 6458,5589 h60